# Altium PCB npm1300_qeaa_config1.PcbDoc
Units mm, origin at the board's own origin, x right, y up, seen from the top; angles counter-clockwise.
Board outline 16.75 x 14 mm, 4 copper layers (Top Layer, Mid-Layer 1, Mid-Layer 2, Bottom Layer), stack 1.592 mm thick; 20 components, 32 nets, 71 pads, 52 vias.
Unrouted connection lines stored in the file: 23.
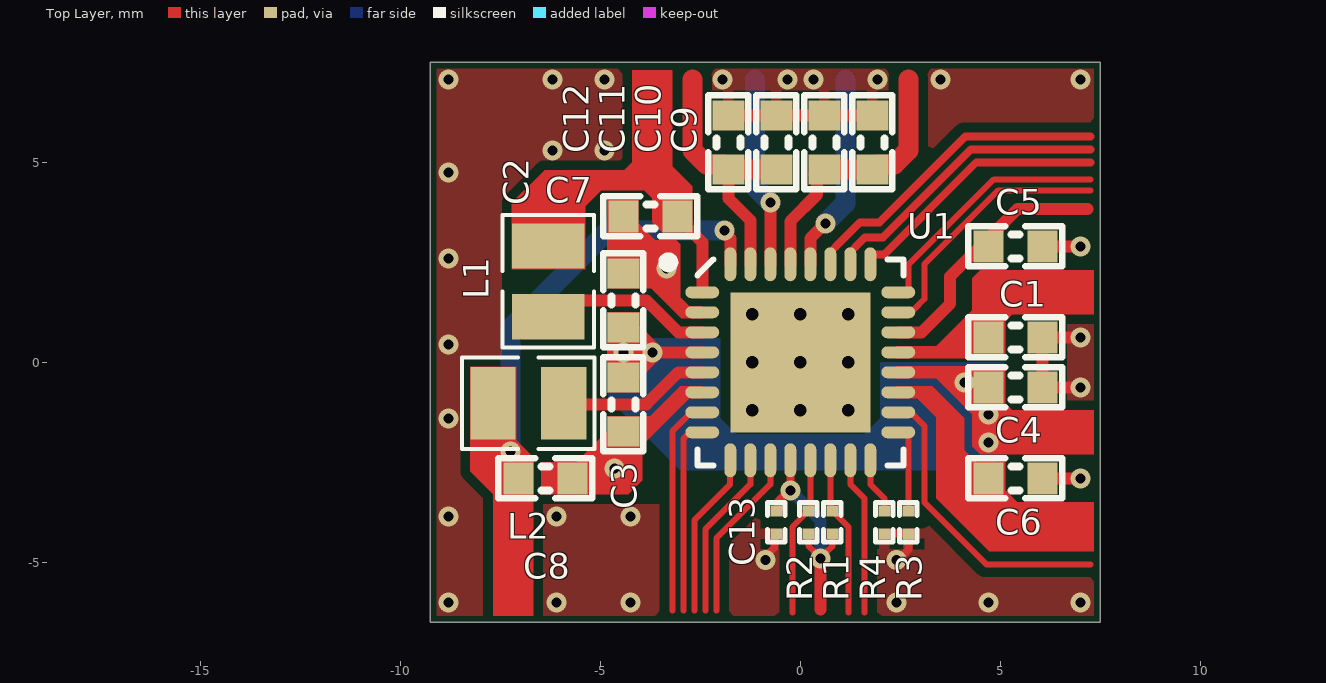
[diagram p0: Top Layer view]
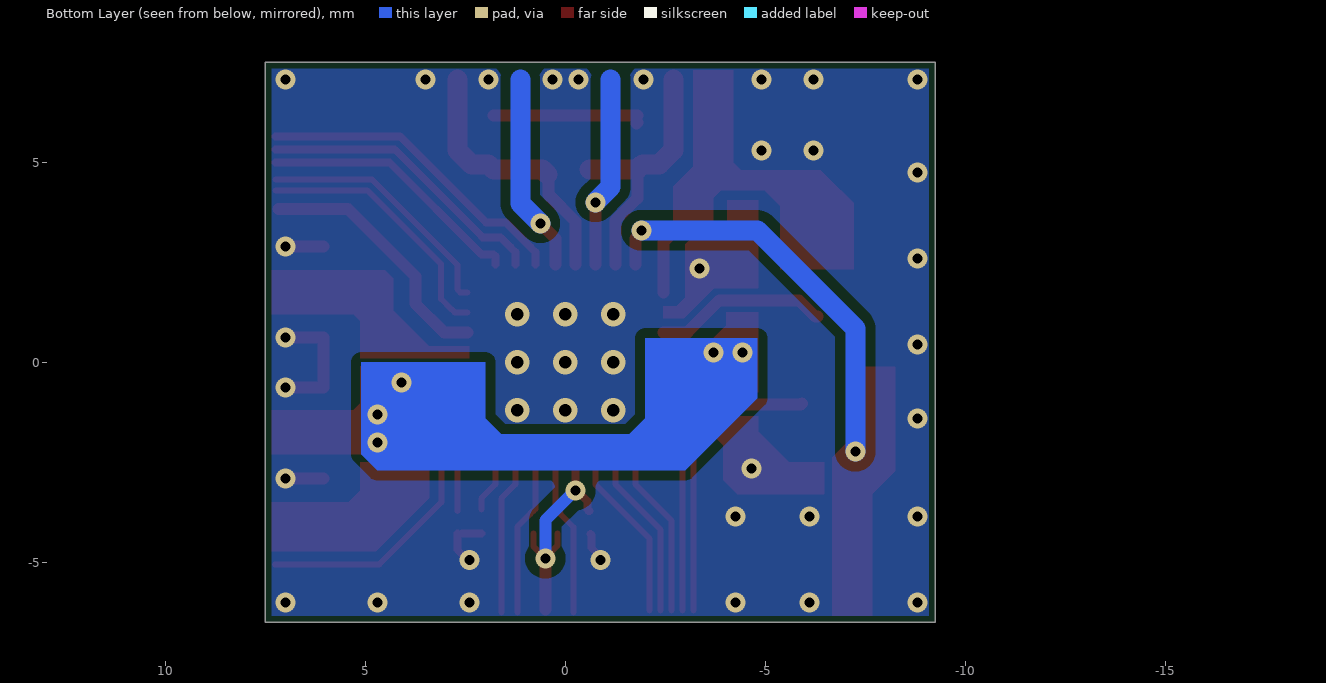
[diagram p1: Bottom Layer view, seen from below]
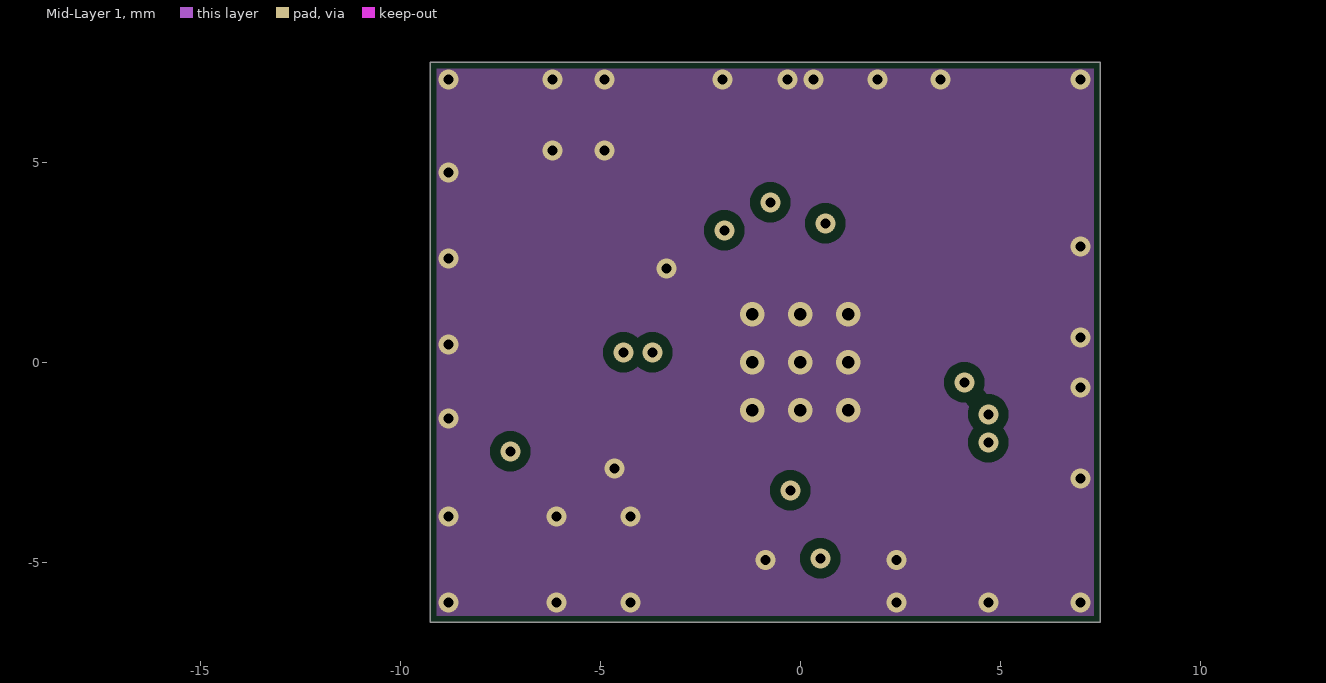
[diagram p2: Mid-Layer 1]
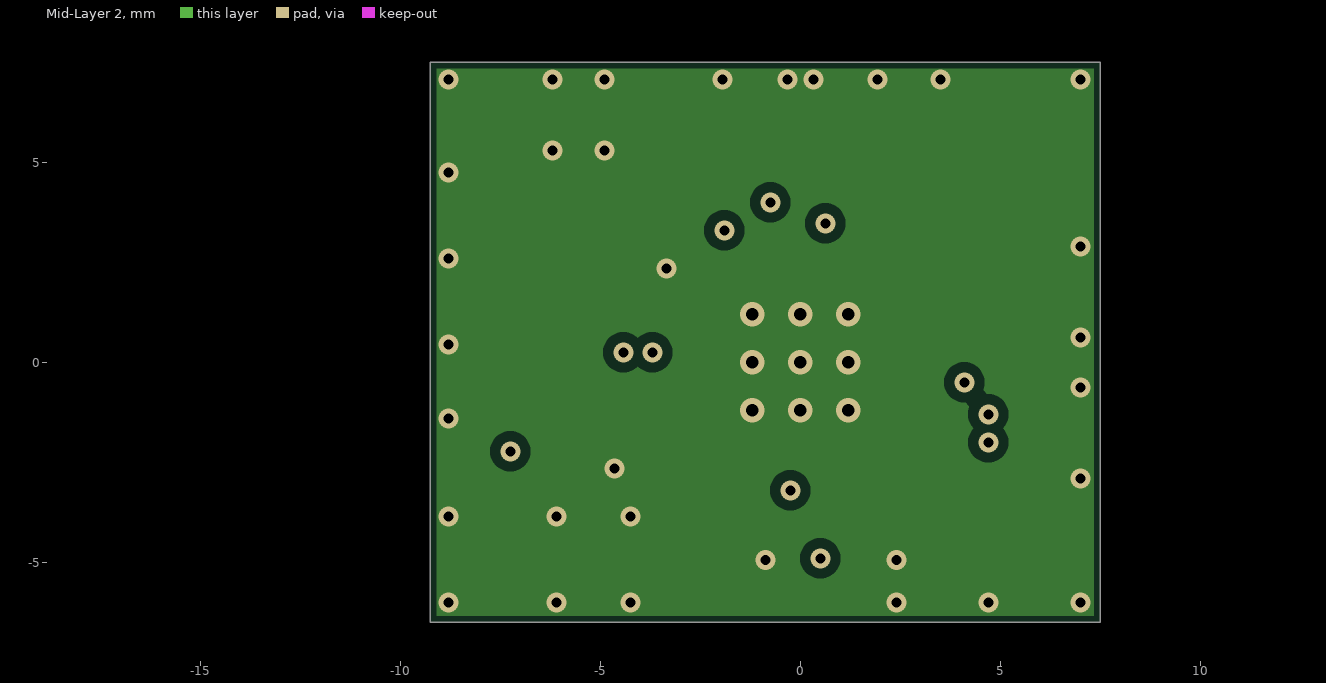
[diagram p3: Mid-Layer 2]
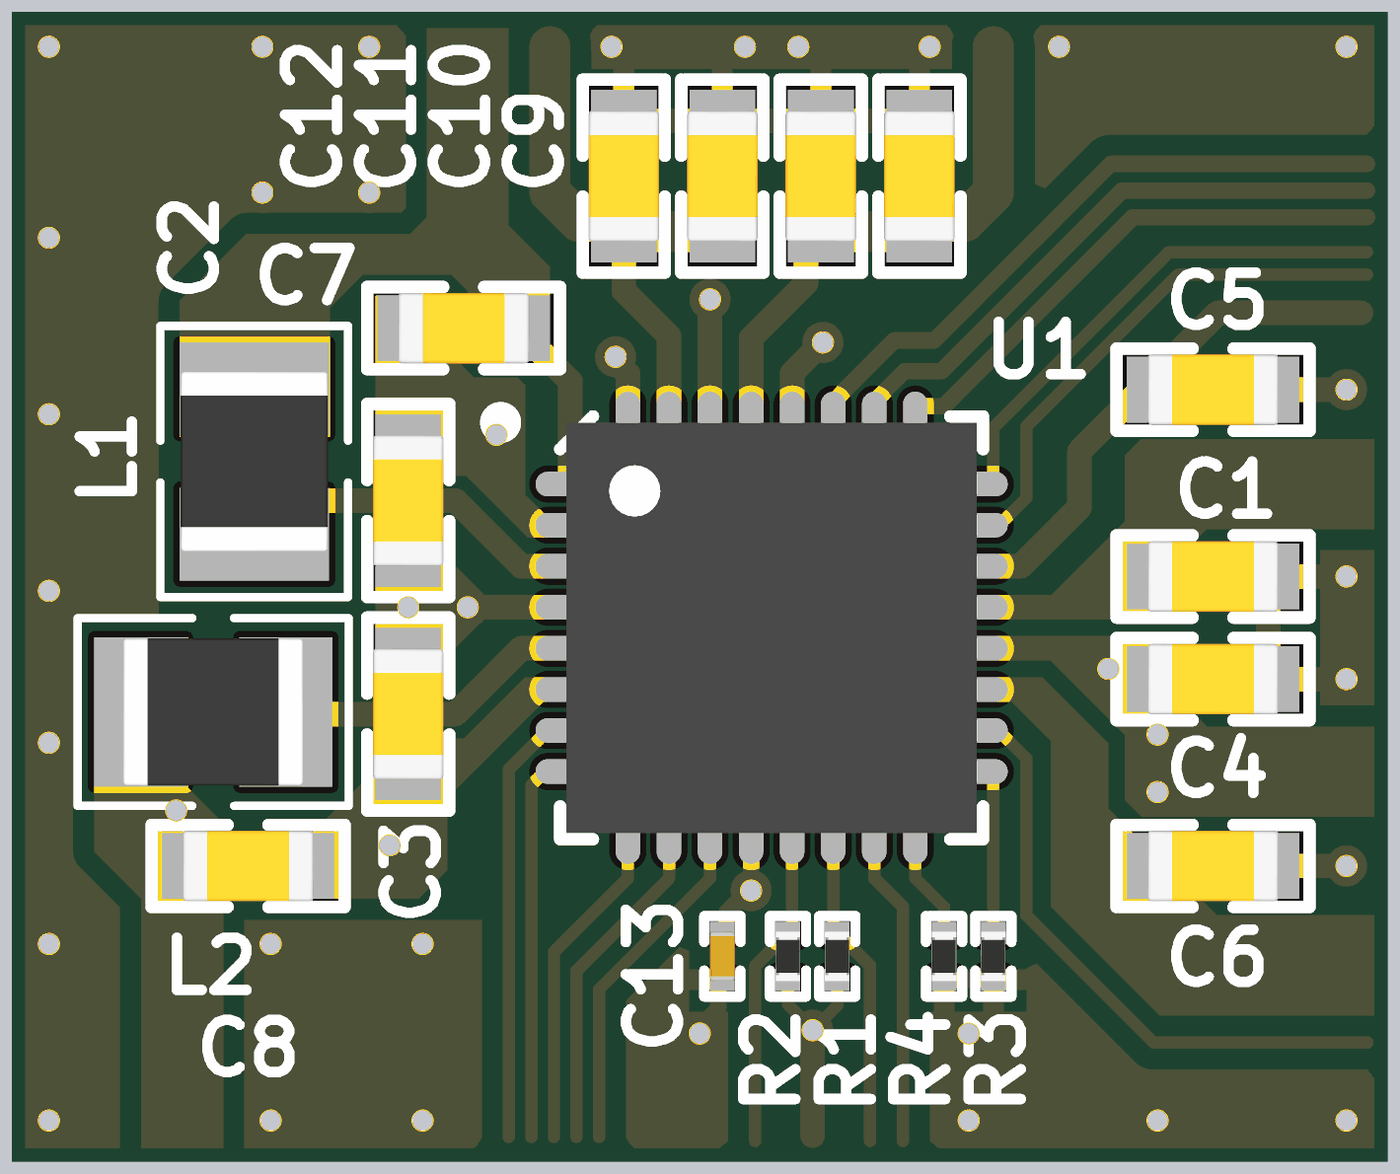
[diagram p4: 3D render of the assembled board from above, using the file's embedded part models]

## Layer stack, top to bottom
Top Solder: solder mask 0.0102, Solder Resist, Dk 3.5
Top Layer: signal copper 0.0356
Dielectric1: prepreg 0.075, FR-4, Dk 4.8
Mid-Layer 1: signal copper 0.0356
Dielectric2: core 1.3, FR-4, Dk 4.8
Mid-Layer 2: signal copper 0.0356
Dielectric 2: prepreg 0.075, FR-4, Dk 4.8
Bottom Layer: signal copper 0.0356
Bottom Solder: solder mask 0.0102, Solder Resist, Dk 3.5

## Board outline
-9.25,7.5 -9.25,-6.5 7.5,-6.5 7.5,7.5

## Design rules (kind name [scope] priority, off if disabled: settings)
BoardOutlineClearance [All] p1: gap=0.15 ignorepadtopadclearanceinfootprint=FALSE
Clearance Polygon_Clearance [(InNamedPolygon('Top_Layer-GND')) or (InNamedPolygon('Bottom_Layer-GND')) or (InNamedPolygon('Mid_Layer_1-GND')) or (InNamedPolygon('Mid_Layer_2-GND'))] p1: gap=0.254 ignorepadtopadclearanceinfootprint=FALSE except(0: Arc-Hole Track-Hole SMDPad-Hole THPad-Hole Via-Hole Fill-Hole Poly-Hole Region-Hole Text-Hole)
Clearance [All] p2: gap=0.125 ignorepadtopadclearanceinfootprint=FALSE
ComponentClearance [All] p1 off: gap=0.254 collisioncheckmode=3 verticalgap=0.254 showdistances=FALSE
DiffPairsRouting [All] p1: maxlimit=0.15 minlimit=0.127 mostfreqgap=0.15 toplayer_mingap=0.15 toplayer_minwidth=0.15 toplayer_maxwidth=0.15 toplayer_prefwidth=0.15 bottomlayer_mingap=0.15 bottomlayer_minwidth=0.15 bottomlayer_maxwidth=0.15 bottomlayer_prefwidth=0.15 impedanceprofiledriven=TRUE impedanceprofileid={DBD80B30-E3CF-4860-A6C7-45E32F93C55D} impedanceprofilevalue=90.000000 maxuncoupledlength=12.7
FabricationTestPointUsage TestPointUsage [All] p1: valid=0 allowmultiple=FALSE
FabricationTestpoint Testpoint [All] p1: side=3 testpointundercomponent=TRUE minsize=1.016 maxsize=2.54 preferedsize=1.524 minholesize=0 maxholesize=1.016 preferedholesize=0.813 testpointgrid=0.025 allowsidetop=TRUE allowsidebottom=TRUE usegrid=TRUE gridtolerance=0
Height [All] p1 off: minheight=0 maxheight=25.4 prefheight=12.7
HoleSize [All] p1: absolutevalues=TRUE maxlimit=5 minlimit=0.1 maxpercent=80.000 minpercent=20.000
MinimumAnnularRing [All] p1 off: minimumring=0.75
PolygonConnect PolygonConnect_GND [InNet('GND')] p1: thpad.connectstyle=Relief thpad.reliefconductorwidth=0.254 thpad.reliefentries=4 thpad.polygonreliefangle="90 Angle" thpad.airgapwidth=0.254 smdpad.connectstyle=Relief smdpad.reliefconductorwidth=0.254 smdpad.reliefentries=4 smdpad.polygonreliefangle="90 Angle" smdpad.airgapwidth=0.254 via.connectstyle=Direct via.reliefconductorwidth=0.254 via.reliefentries=4 via.polygonreliefangle="90 Angle" via.airgapwidth=0.254
PolygonConnect [All] p2: connectstyle=Direct reliefconductorwidth=0.254 reliefentries=4 polygonreliefangle="90 Angle" airgapwidth=0.254
RoutingVias [All] p1: holewidth=0.305 width=0.61 viastyle="Through Hole" minholewidth=0.305 minwidth=0.61 maxholewidth=0.711 maxwidth=1.27 useviatemplates=TRUE viatemplateguid#1={6F225C6A-EE86-4657-A426-C9A0349870D4} viatemplatename#1=v50h25m0mx0
ShortCircuit ShortCircuit_PVSS [InNet('PVSS1') or InNet('PVSS2') vs InNet('GND')] p1: allowed=TRUE
ShortCircuit [All] p2: allowed=FALSE
SilkToSolderMaskClearance SilkscreenOverComponentPads [IsPad] p1: minsilkscreentomaskgap=0.254 clearancetoexposedcopper=TRUE
SolderMaskExpansion SolderMaskExpansion_Vias [IsVia] p1: expansion=0.102 istentingtop=TRUE
SolderMaskExpansion [All] p2: expansion=0.076 istentingtop=FALSE
UnRoutedNet [All] p1: checkbadconnections=TRUE
Width [All] p1: maxlimit=2 minlimit=0.12 preferedwidth=0.3
21 further rules are at their usual default settings.

## Components (designator, comment, footprint, x,y, rotation, side; value= is the part's Value field where it differs from the comment)
C1 "1.0µF" CAPC1608X06L 5.375,0.625 r180 top
C2 "10µF" CAPC1608X06L -4.425,1.55 r270 top
C3 "10µF" CAPC1608X06L -4.425,-1.05 r90 top
C4 "10µF" CAPC1608X06L 5.375,-0.625 r180 top
C5 "1.0µF" CAPC1608X06L 5.375,2.9 r180 top
C6 "2.2µF" CAPC1608X06L 5.375,-2.9 r180 top
C7 "10µF" CAPC1608X06L -3.75,3.65 r0 top
C8 "10µF" CAPC1608X06L -6.375,-2.9 r180 top
C9 "10µF" CAPC1608X06L 1.8,5.5 r270 top
C10 "10µF" CAPC1608X06L 0.6,5.5 r270 top
C11 "10µF" CAPC1608X06L -0.6,5.5 r270 top
C12 "10µF" CAPC1608X06L -1.8,5.5 r270 top
C13 "100nF" CAPC0603X03L_C -0.6,-4 r270 top
L1 "2.2µH" INDC2016X10N -6.3,2.025 r270 top
L2 "2.2µH" INDC2016X10N -6.8,-1.025 r0 top
R1 "10k" RESC0603X03L_C 0.8,-4 r270 top
R2 "10k" RESC0603X03L_C 0.2,-4 r270 top
R3 "47k" RESC0603X03L_C 2.7,-4 r270 top
R4 "150k" RESC0603X03L_C 2.1,-4 r270 top
U1 "nPM1300-QEAA" Nordic_QFN50P500X500X90-33N 0,0 r0 top locked

## Footprints (in the part's own frame and the unit in brackets; to place one, negate y for a bottom-side part, rotate by r counter-clockwise, add the part's x,y. Pads: shape width x height; smd on the part's side, far side on the other; paste and mask are expansions set on the pad)
CAPC0603X03L_C [mm] "Chip Capacitor, 2-Leads, Body 0.6x0.3mm, IPC High Density"
  rect 0.27x0.3 smd mask+0.05: 1(-0.285,0) 2(0.285,0)
  silkscreen extent -0.49,-0.22 0.49,0.22, body extent -0.3,-0.15 0.31,0.15, height 0.3
CAPC1608X06L [mm] "Chip Capacitor, 2-Leads, Body 1.6x0.8mm, IPC High Density"
  rect 0.75x0.8 smd: 1(-0.675,0) 2(0.675,0)
  silkscreen extent -1.17,-0.5 1.17,0.5, body extent -0.8,-0.43 0.8,0.43, height 0.8
INDC2016X10N [mm] "Chip Inductor, 2-Leads, Body 2.00x1.60mm, IPC Medium Density"
  rect 1.13x1.82 smd: 1(-0.885,0) 2(0.885,0)
  silkscreen extent -1.65,-1.14 1.65,1.14, body extent -1.1,-0.9 1.1,0.9, height 1
Nordic_QFN50P500X500X90-33N [mm] "QFN32 5x5x0.85mm, 0.5mm pitch - Medium Density"
  oval 0.85x0.3 smd mask+0.076: 1(-2.45,1.75) 2(-2.45,1.25) 3(-2.45,0.75) 4(-2.45,0.25) 5(-2.45,-0.25) 6(-2.45,-0.75) 7(-2.45,-1.25) 8(-2.45,-1.75) 17(2.45,-1.75) 18(2.45,-1.25) 19(2.45,-0.75) 20(2.45,-0.25) 21(2.45,0.25) 22(2.45,0.75) 23(2.45,1.25) 24(2.45,1.75)
  oval 0.3x0.85 smd mask+0.076: 9(-1.75,-2.45) 10(-1.25,-2.45) 11(-0.75,-2.45) 12(-0.25,-2.45) 13(0.25,-2.45) 14(0.75,-2.45) 15(1.25,-2.45) 16(1.75,-2.45) 25(1.75,2.45) 26(1.25,2.45) 27(0.75,2.45) 28(0.25,2.45) 29(-0.25,2.45) 30(-0.75,2.45) 31(-1.25,2.45) 32(-1.75,2.45)
  rect 3.5x3.5 smd: 33(0,0)
  silkscreen extent -3.42,-2.57 2.57,2.62, body extent -2.5,-2.5 2.5,2.5, height 0.9
RESC0603X03L_C [mm] "Chip Resistor, 2-Leads, Body 0.6x0.3mm, IPC High Density"
  rect 0.27x0.3 smd: 1(-0.285,0) 2(0.285,0)
  silkscreen extent -0.49,-0.22 0.49,0.22, body extent -0.3,-0.15 0.3,0.15, height 0.23

## Part data
C1 C5: library part C0603-1µ0-10V-X5R, "Capacitor, Ceramic, 1.0µF 10V X5R 0603,±10%", Manufacturer=N.A., Part number NEMS=100200528, Artikkelnr Noca=N.A., Author=getr, Component Class=Capacitors, Component Status=Active, ComponentLink1Description=Datasheet, ComponentLink1URL=N.A., ComponentLink2Description="Supplier link", ComponentLink2URL=N.A., Footprint Doc=0603, HelpURL=N.A., LatestRevisionDate=2022-10-06, Manufacturer Part Number=N.A., Note=10V, Pad Count=2, Part Number=C0603-1µ0-10V-X5R, Part number IPS=N.A., Part number Norautron=N.A., PartId=100200528, Published=2022-10-06, Supplier 1=N.A., Supplier 2=N.A., Supplier Part Number 1=N.A., Supplier Part Number 2=N.A.
C2 C3 C4 C7 C8 C9 C10 C11 C12: library part C0603-10µ, "Capacitor, X5R, ±20%", Manufacturer=N.A., Part number IPS=00000007785, Part number NEMS=100200275, Artikkelnr Noca=20039234, Author=rsk, Component Class=Capacitors, Component Status=Active, ComponentLink1Description=Datasheet, ComponentLink1URL=N.A., ComponentLink2Description="Supplier link", ComponentLink2URL=N.A., Footprint Doc=0603, HelpURL=N.A., LatestRevisionDate=2011-01-17, Manufacturer Part Number=N.A., Note=6.3V, Pad Count=2, Part Number=C0603-10µ, Part number Norautron=N.A., PartId=100200275, Published=2011-01-17, Supplier 1=N.A., Supplier 2=N.A., Supplier Part Number 1=N.A., Supplier Part Number 2=N.A.
C6: library part C0603-2.2µ-16V-X7R, "Capacitor, Ceramic, X7R, ±10%, 16V", Manufacturer="Taiyo Yuden", Manufacturer Part Number=EMK107BB7225KA-T, Part number IPS=N.A., Part number NEMS=100200439, Supplier Part Number 1=587-5835-2-ND, Artikkelnr Noca=N.A., Author=rsk, Component Class=Capacitors, Component Status=Active, ComponentLink1Description=Datasheet, ComponentLink1URL=https://ds.yuden.co.jp/TYCOMPAS/ut/specSheet?pn=EMK107BB7225KA-T, ComponentLink2Description="Supplier link", ComponentLink2URL=https://ds.yuden.co.jp/TYCOMPAS/ut/detail?pn=EMK107BB7225KA-T&u=M, Footprint Doc=0603, HelpURL=https://www.digikey.no/product-detail/en/taiyo-yuden/EMK107BB7225KA-T/587-5835-2-ND/4970646, LatestRevisionDate=2020-10-13, Note=16V, Pad Count=2, Part Number=C0603-2.2µ-16V-X7R, Part number Norautron=N.A., PartId=100200439, Published=2020-02-03, Supplier 1=Digi-Key, Supplier 2=N.A., Supplier Part Number 2=N.A.
C13: library part C0201-100n, "Capacitor, X5R, ±10%", Manufacturer=N.A., Part number IPS="00000001248, 00000002505", Part number NEMS=100200078, Part number Norautron=262071862, Artikkelnr Noca=N.A., Author=rsk, Component Class=Capacitors, Component Status=Active, ComponentLink1Description=Datasheet, ComponentLink1URL=N.A., ComponentLink2Description="Supplier link", ComponentLink2URL=N.A., Footprint Doc=0201, HelpURL=N.A., LatestRevisionDate=2017-11-09, Manufacturer Part Number=N.A., Note=16V, Pad Count=2, Part Number=C0201-100n, PartId=100200078, Published=2014-11-13, Supplier 1=N.A., Supplier 2=N.A., Supplier Part Number 1=N.A., Supplier Part Number 2=N.A.
L1 L2: library part L0806-2µ2-2500mA-73mOhm-CIGT201610EH2R2MNE, "Inductor, Irms=2.5A, Isat=2.9A, ±20%, DCR=73mΩ", Manufacturer="Samsung Electro-Mechanics", Manufacturer Part Number=CIGT201610EH2R2MNE, Part number IPS=N.A., Part number NEMS=100300400, Part number Norautron=26521789, Supplier Part Number 1=1276-6901-1-ND, Artikkelnr Noca=N.A., Author=rsk, Component Class=Inductors, Component Status=Active, ComponentLink1Description=Datasheet, ComponentLink1URL=https://media.digikey.com/pdf/Data%20Sheets/Samsung%20PDFs/CIGT201610EH2R2MNE_Spec.pdf, ComponentLink2Description="Supplier link", ComponentLink2URL=https://www.digikey.com/en/products/detail/samsung-electro-mechanics/CIGT201610EH2R2MNE/7041223?s=N4IgTCBcDaIMIEkDiAVMAGAjANk%2BgogBJgBKYAsgHL4gC6AvkA, Footprint Doc=0806, HelpURL=http://product.samsungsem.com/pi/CIGT201610EH2R2MN.do, LatestRevisionDate=2022-09-07, Note="Unshielded Thin Film Inductor", Pad Count=2, Part Number=L0806-2µ2-2500mA-73mOhm-CIGT201610EH2R2MNE, PartId=100300400, Published=2021-02-03, Supplier 1=Digi-Key, Supplier 2=Mouser, Supplier Part Number 2=187-CIGT201610EH2R2M
R1 R2: library part R0201-10k, "Resistor, ±1%, 0.05W", Manufacturer=N.A., Part number IPS=00000001255, Part number NEMS=100100065, Part number Norautron=26107101, Artikkelnr Noca=N.A., Author=rsk, Component Class=Resistors, Component Status=Active, ComponentLink1Description=Datasheet, ComponentLink1URL=N.A., ComponentLink2Description="Supplier link", ComponentLink2URL=N.A., Footprint Doc=0201, HelpURL=N.A., LatestRevisionDate=2014-11-13, Manufacturer Part Number=N.A., Note="Chip Res 1%", Pad Count=2, Part Number=R0201-10k, PartId=100100065, Published=2014-11-13, Supplier 1=N.A., Supplier 2=N.A., Supplier Part Number 1=N.A., Supplier Part Number 2=N.A.
R3: library part R0201-47k, "Resistor, ±1%, 0.05W", Manufacturer=N.A., Part number IPS=00000001423, Part number NEMS=100100076, Artikkelnr Noca=N.A., Author=rsk, Component Class=Resistors, Component Status=Active, ComponentLink1Description=Datasheet, ComponentLink1URL=N.A., ComponentLink2Description="Supplier link", ComponentLink2URL=N.A., Footprint Doc=0201, HelpURL=N.A., LatestRevisionDate=2014-11-13, Manufacturer Part Number=N.A., Note="Chip Res 1%", Pad Count=2, Part Number=R0201-47k, Part number Norautron=N.A., PartId=100100076, Published=2014-11-13, Supplier 1=N.A., Supplier 2=N.A., Supplier Part Number 1=N.A., Supplier Part Number 2=N.A.
R4: library part R0201-150k, "Resistor, ±1%, 0.05W", Manufacturer=N.A., Part number IPS=00000001422, Part number NEMS=100100082, Artikkelnr Noca=N.A., Author=rsk, Component Class=Resistors, Component Status=Active, ComponentLink1Description=Datasheet, ComponentLink1URL=N.A., ComponentLink2Description="Supplier link", ComponentLink2URL=N.A., Footprint Doc=0201, HelpURL=N.A., LatestRevisionDate=2014-11-13, Manufacturer Part Number=N.A., Note="Chip Res 1%", Pad Count=2, Part Number=R0201-150k, Part number Norautron=N.A., PartId=100100082, Published=2014-11-13, Supplier 1=N.A., Supplier 2=N.A., Supplier Part Number 1=N.A., Supplier Part Number 2=N.A.
U1: "Li-Ion/Li-Polymer USB-C battery charger with high efficiency buck regulators, LDOs or load switches, LED drivers, TWI and VBUSOUT", Manufacturer="Nordic Semiconductor", Part number IPS=N.A., Part number NEMS=102000252, Artikkelnr Noca=N.A., Author=eisk, Component Class=nRF_Devices, Component Status=Active, ComponentLink1Description=Datasheet, ComponentLink1URL=N.A., ComponentLink2Description="Supplier link", ComponentLink2URL=N.A., Footprint Doc=QFN-32, HelpURL=N.A., LatestRevisionDate=2022-11-14, Manufacturer Part Number=nPM1300-QEAA, Note=N.A., Pad Count=33, Part Number=nPM1300-QEAA, Part number Norautron=N.A., PartId=102000252, Published=2022-02-17, Supplier 1="Nordic Semiconductor", Supplier 2=N.A., Supplier Part Number 1=nPM1300-QEAA, Supplier Part Number 2=N.A.

## Via types
v1: diameter 0.5, hole 0.25, Top Layer to Bottom Layer, tented both sides, 43 vias
v2: diameter 0.61, hole 0.305, Top Layer to Bottom Layer, tented both sides, 9 vias

## Nets (pads, with @x,y where several pads share a name; then routed paths per layer and width w, separated by ;. In a path a pad name is that pad's centre, name@x,y a point inside that pad or via, vN(x,y) a via of type N, cw(c..) or ccw(c..) an arc to the next point about the centre after c; other vN are vias at no path point)
CC1: U1.23 | length 6.6
  Top Layer w0.15: U1.23 2.766,1.25 2.841,1.325 2.846,1.325 3.104,1.583 3.104,2.453 4.951,4.3 7.25,4.3
CC2: U1.24 | length 6.3
  Top Layer w0.15: U1.24 2.631,1.75 2.7,1.819 2.7,2.438 4.837,4.575 7.25,4.575
GND: C1.1 C4.1 C5.1 C6.1 C9.1 C10.1 C11.1 C12.1 C13.2 R3.2 R4.2 U1.33 | length 10
  Top Layer w0.2: v1(-0.875,-4.941) -0.875,-4.859 -0.65,-4.634 -0.65,-4.315 C13.2@-0.627,-4.292 ; R4.2 R3.2@2.585,-4.285 ; v1(2.4,-4.941) 2.444,-4.941 2.7,-4.685 R3.2
  Top Layer w0.3: C12.1@-1.8,6 C12.1@-1.775,5.975 ; C12.1 C10.1 C9.1 ; C6.1 v1@6.9,-2.9 ; C4.1 C1.1 v1@6.8,0.625 ; C5.1 v1@6.8,2.9 ; C4.1@6.125,-0.625 v1@6.8,-0.625
  other v1: -8.8,-6 -6.1,-6 -4.25,-6 2.4,-6 4.7,-6 7,-6 -8.8,-3.85 -6.1,-3.85 -4.25,-3.85 7,-2.9 -4.65,-2.65 -8.8,-1.4 7,-0.625 -8.8,0.45 7,0.625 -3.35,2.35 -8.8,2.6 7,2.9 -8.8,4.75 -6.2,5.3 -4.9,5.3 -8.8,7.075 -6.2,7.075 -4.9,7.075 -1.95,7.075 -0.325,7.075 0.325,7.075 1.925,7.075 3.5,7.075 7,7.075
  other v2: -1.2,-1.2 0,-1.2 1.2,-1.2 -1.2,0 0,0 1.2,0 -1.2,1.2 0,1.2 1.2,1.2
GPIO0: U1.7 | length 5.4
  Top Layer w0.15: -3.2,-6.2 -3.2,-1.725 -2.725,-1.25 U1.7
GPIO1: U1.8 | length 4.8
  Top Layer w0.15: -2.925,-6.2 -2.925,-1.913 -2.762,-1.75 U1.8
GPIO2: U1.9 | length 4.1
  Top Layer w0.15: -2.65,-6.2 -2.65,-3.95 -1.753,-3.053 -1.753,-2.453 U1.9
GPIO3: U1.10 | length 4.2
  Top Layer w0.15: -2.375,-6.2 -2.375,-4.175 -1.25,-3.05 U1.10
GPIO4: U1.11 | length 4.3
  Top Layer w0.15: -2.1,-6.2 -2.1,-4.4 -0.75,-3.05 U1.11
LED0: U1.25 | length 6.7
  Top Layer w0.2: U1.25 1.75,2.652 1.796,2.698 2.098,2.698 4.4,5 7.25,5
LED1: U1.26 | length 7.4
  Top Layer w0.2: U1.26 1.25,2.752 1.375,2.877 1.375,2.88 1.62,3.125 2.065,3.125 4.265,5.325 7.25,5.325
LED2: U1.27 | length 8
  Top Layer w0.2: U1.27 0.75,2.752 0.875,2.877 0.875,2.88 1.495,3.5 1.981,3.5 4.131,5.65 7.25,5.65
NTC: U1.18 | length 7.5
  Top Layer w0.15: U1.18 2.761,-1.25 3.1,-1.589 3.1,-3.5 4.65,-5.05 7.255,-5.05
PVSS1: C2.1 C7.1 U1.2 | length 0
  Top Layer w0.3: -3.35,2.35 -3.338,2.338 -3.338,2.35
PVSS2: C3.1 C8.1 U1.6
SCL: R1.1 U1.14 | length 4
  Top Layer w0.15: U1.14 0.75,-3.665 R1.1 0.815,-3.715 0.875,-3.775 0.875,-3.79 1.2,-4.115 1.2,-6.25
SDA: R2.1 U1.13 | length 4
  Top Layer w0.15: -0.2,-6.25 -0.2,-4.117 0.125,-3.792 0.125,-3.775 0.22,-3.68 0.25,-3.68 U1.13
SHPHLD: U1.15 | length 3.9
  Top Layer w0.15: U1.15 1.25,-3.05 1.6,-3.4 1.6,-6.25
SW1: L1.2 U1.3 | length 4.4
  Top Layer w0.3: L1.2 -6.25,1.14 -5.84,1.55 -3.85,1.55 -3.05,0.75 U1.3
SW2: L2.2 U1.5 | length 3.8
  Top Layer w0.3: L2.2 -5.89,-1.05 -3.85,-1.05 -3.05,-0.25 U1.5
VBAT: C6.2 U1.19
VBUSIN: C1.2 U1.21
VBUSOUT: C5.2 U1.22 | length 6.4
  Top Layer w0.3: U1.22 3.033,0.75 3.748,1.465 3.748,2.148 5.434,3.834 7.175,3.834
VDDIO: C13.1 R1.2 R2.2 U1.12 | length 6.2
  Top Layer w0.15: R2.2 0.2,-4.586 v1@0.45,-4.836 ; v1@0.5,-4.786 v1(0.5,-4.9) 0.8,-4.6 R1.2
  Top Layer w0.2: C13.1 -0.585,-3.715 -0.55,-3.68 -0.55,-3.467 -0.283,-3.2 v1(-0.25,-3.2) -0.25,-3 U1.12
  Top Layer w0.3: 0.5,-6.182 v1(0.5,-4.9)
  Bottom Layer w0.3: v1(-0.25,-3.2) 0.5,-3.95 v1(0.5,-4.9)
VINLDO1: U1.28 | length 5
  Top Layer w0.3: U1.28 0.25,3.1 v1(0.625,3.475)
  Bottom Layer w0.5: v1(0.625,3.475) 1.125,3.975 1.125,7.075
VINLDO2: U1.30 | length 4.8
  Top Layer w0.3: U1.30 v1(-0.75,4)
  Bottom Layer w0.5: -1.135,7.075 -1.135,4.385 v1(-0.75,4)
VOUT1: C7.2 L1.1 U1.1 | length 2.1
  Top Layer w0.3: C7.2@-3.075,3.625 -2.45,3 U1.1
VOUT2: C8.2 L2.1 U1.32 | length 13.3
  Top Layer w0.3: L2.1 L2.1@-7.275,-1.435 ; v1(-7.25,-2.225) -7.27,-2.205 -7.27,-1.44 L2.1@-7.275,-1.435 ; C8.2 -7.275,-2.675 L2.1@-7.275,-1.435 ; v1(-1.9,3.3) -1.9,3.246 -1.75,3.096 U1.32
  Bottom Layer w0.5: v1(-7.25,-2.225) -7.25,0.85 -4.8,3.3 v1(-1.9,3.3)
VOUTLDO1: C9.2 C10.2 U1.29 | length 7
  Top Layer w0.3: U1.29 -0.25,3.525 0.419,4.194 0.419,4.669 C10.2@0.45,4.7
  Top Layer w0.5: C10.2@0.45,4.7 0.575,4.825 C10.2 C9.2 ; 2.7,7.075 2.7,5.3 2.35,4.95 C9.2@1.925,4.95 ; C9.2 C9.2@1.925,4.95 ; C9.2 C9.2@1.925,4.95
VOUTLDO2: C11.2 C12.2 U1.31 | length 6.7
  Top Layer w0.3: C12.2 -1.8,4.1 -1.25,3.55 U1.31
  Top Layer w0.5: -2.7,7.075 -2.7,5.3 -2.35,4.95 -1.925,4.95 C12.2 C11.2
VSET1: R3.1 U1.17 | length 2.2
  Top Layer w0.15: U1.17 2.631,-1.75 2.7,-1.819 R3.1
VSET2: R4.1 U1.16 | length 1.4
  Top Layer w0.15: U1.16 1.75,-3.05 2.1,-3.4 R4.1@2.1,-3.684
VSYS: C2.2 C3.2 C4.2 U1.4 U1.20 | length 1.1
  Top Layer w0.3: v1@-3.596,0.25 U1.4
  other v1: 4.7,-2 4.7,-1.3 4.1,-0.5 -4.425,0.25 -3.7,0.25

## Polygon pours and split planes (outlines as drawn)
GND on Mid-Layer 1 "Mid_Layer_1-GND" (solid, remove dead copper, pour order 24): -9.25,-6.5 7.5,-6.5 7.5,7.5 -9.25,7.5
GND on Mid-Layer 2 "Mid_Layer_2-GND" (solid, remove dead copper, pour order 25): -9.25,-6.5 7.5,-6.5 7.5,7.5 -9.25,7.5
GND on Bottom Layer "Bottom_Layer-GND" (solid, remove dead copper, pour order 26): -9.25,-6.5 7.5,-6.5 7.5,7.5 -9.25,7.5
GND on Top Layer "Top_Layer-GND" (solid, remove dead copper, pour order 21): -9.25,-6.5 7.5,-6.5 7.5,7.5 -9.25,7.5

## Other copper
Top Layer:
  region net VOUT1: -4.975,4.3 -3.9,4.3 -3.7,4.1 -3.704,4.096 -3.704,3.504 -3.45,3.25 -2.7,3.25 -2.7,4.4 -3.2,4.9 -3.2,7.3 -4.2,7.3 -4.2,5 -4.4,4.8 -6.393,4.8 -6.593,4.6 -7.21,3.983 -7.21,2.325 -5.375,2.325 -5.375,3.9
  pour cut-out: -4.8,2.106 -4.8,2.894 -3.138,2.894 -3.138,2.106
  region net VOUT2: -6.675,-2.375 -6.675,-6.338 -7.679,-6.338 -7.679,-2.375
  region net VBUSIN: 5.125,0.1 5.125,1.025 5.3,1.2 7.338,1.2 7.338,2.3 4.5,2.3 4.3,2.1 4.3,1.3 3.4,0.4 2.4,0.4 2.4,0.1
  region net VSYS: 5.125,-0.1 5.125,-1.025 5.3,-1.2 7.338,-1.2 7.338,-2.3 4.5,-2.3 4.3,-2.1 4.3,-1.3 3.4,-0.4 2.4,-0.4 2.4,-0.1
  region net VBAT: 2.4,-0.9 2.925,-0.9 3.4,-1.375 3.4,-3.4 4.725,-4.725 7.338,-4.725 7.338,-3.5 5.425,-3.5 5.125,-3.2 5.125,-2.5 4.4,-2.5 4.1,-2.2 4.1,-1.4 3.3,-0.6 2.4,-0.6
  region net PVSS2: -2.45,-0.6 -3,-0.6 -3.75,-1.35 -4.825,-1.35 -4.825,-1.725 -5.6,-2.5 -6.475,-2.5 -6.475,-3.3 -4.3,-3.3 -3.95,-2.95 -3.95,-2.075 -2.775,-0.9 -2.45,-0.9
  pour cut-out: -1.85,1.85 1.85,1.85 1.85,-1.85 -1.85,-1.85
  pour cut-out: -6.5,-2.766 -6.5,-3.555 -3.138,-3.555 -3.138,-2.766
  region net VOUT2: -7.1,-0.115 -7.1,-1.95 -6.675,-2.375 -6.675,-3.3 -7.679,-3.3 -8.25,-2.729 -8.25,-0.115
  region net PVSS1: -4.825,4.05 -4.05,4.05 -4.05,3.475 -3.625,3.05 -3.1,3.05 -3,2.95 -3,1.625 -2.775,1.4 -2.45,1.4 -2.45,1.1 -2.975,1.1 -3.725,1.85 -4.825,1.85
  pour cut-out: -7.464,2.325 -7.464,-0.115 -5.375,-0.115 -5.375,2.325
  region net VSYS: -3.5,0.4 -4.025,0.925 -4.025,1.25 -4.825,1.25 -4.825,-0.75 -4.025,-0.75 -4.025,-0.425 -3.5,0.1
  pour cut-out: -17.9,1.7 -17.9,-3.2
  pour cut-out: 7.375,0.45 7.375,-0.41
Mid-Layer 1:
  pour cut-out: 11.025,5.525 12.025,5.525
Bottom Layer:
  region net VSYS: -4.8,0.6 -4.8,-0.9 -3,-2.7 4.7,-2.7 5.1,-2.3 5.1,0 2,0 2,-1.4 1.6,-1.8 -1.6,-1.8 -2,-1.4 -2,0.6

## Silkscreen, mask and mechanical layers (free items; w line width, h text height)
Board Outline:
  the board outline again, w0.2

## Dimensions
7.5,-6.5 to 7.5,7.5 on Dimension
-9.25,-6.5 to 7.5,-6.5 on Dimension